# Altium PCB MOD-ADC-10.PCBDOC (part 1 of 4)
Units mm, origin at the board's own origin, x right, y up, seen from the top; angles counter-clockwise.
Board outline 80 x 100 mm, 4 copper layers (L1, P2, L3, L4), stack 1.512 mm thick; 199 components, 170 nets, 717 pads, 298 vias.
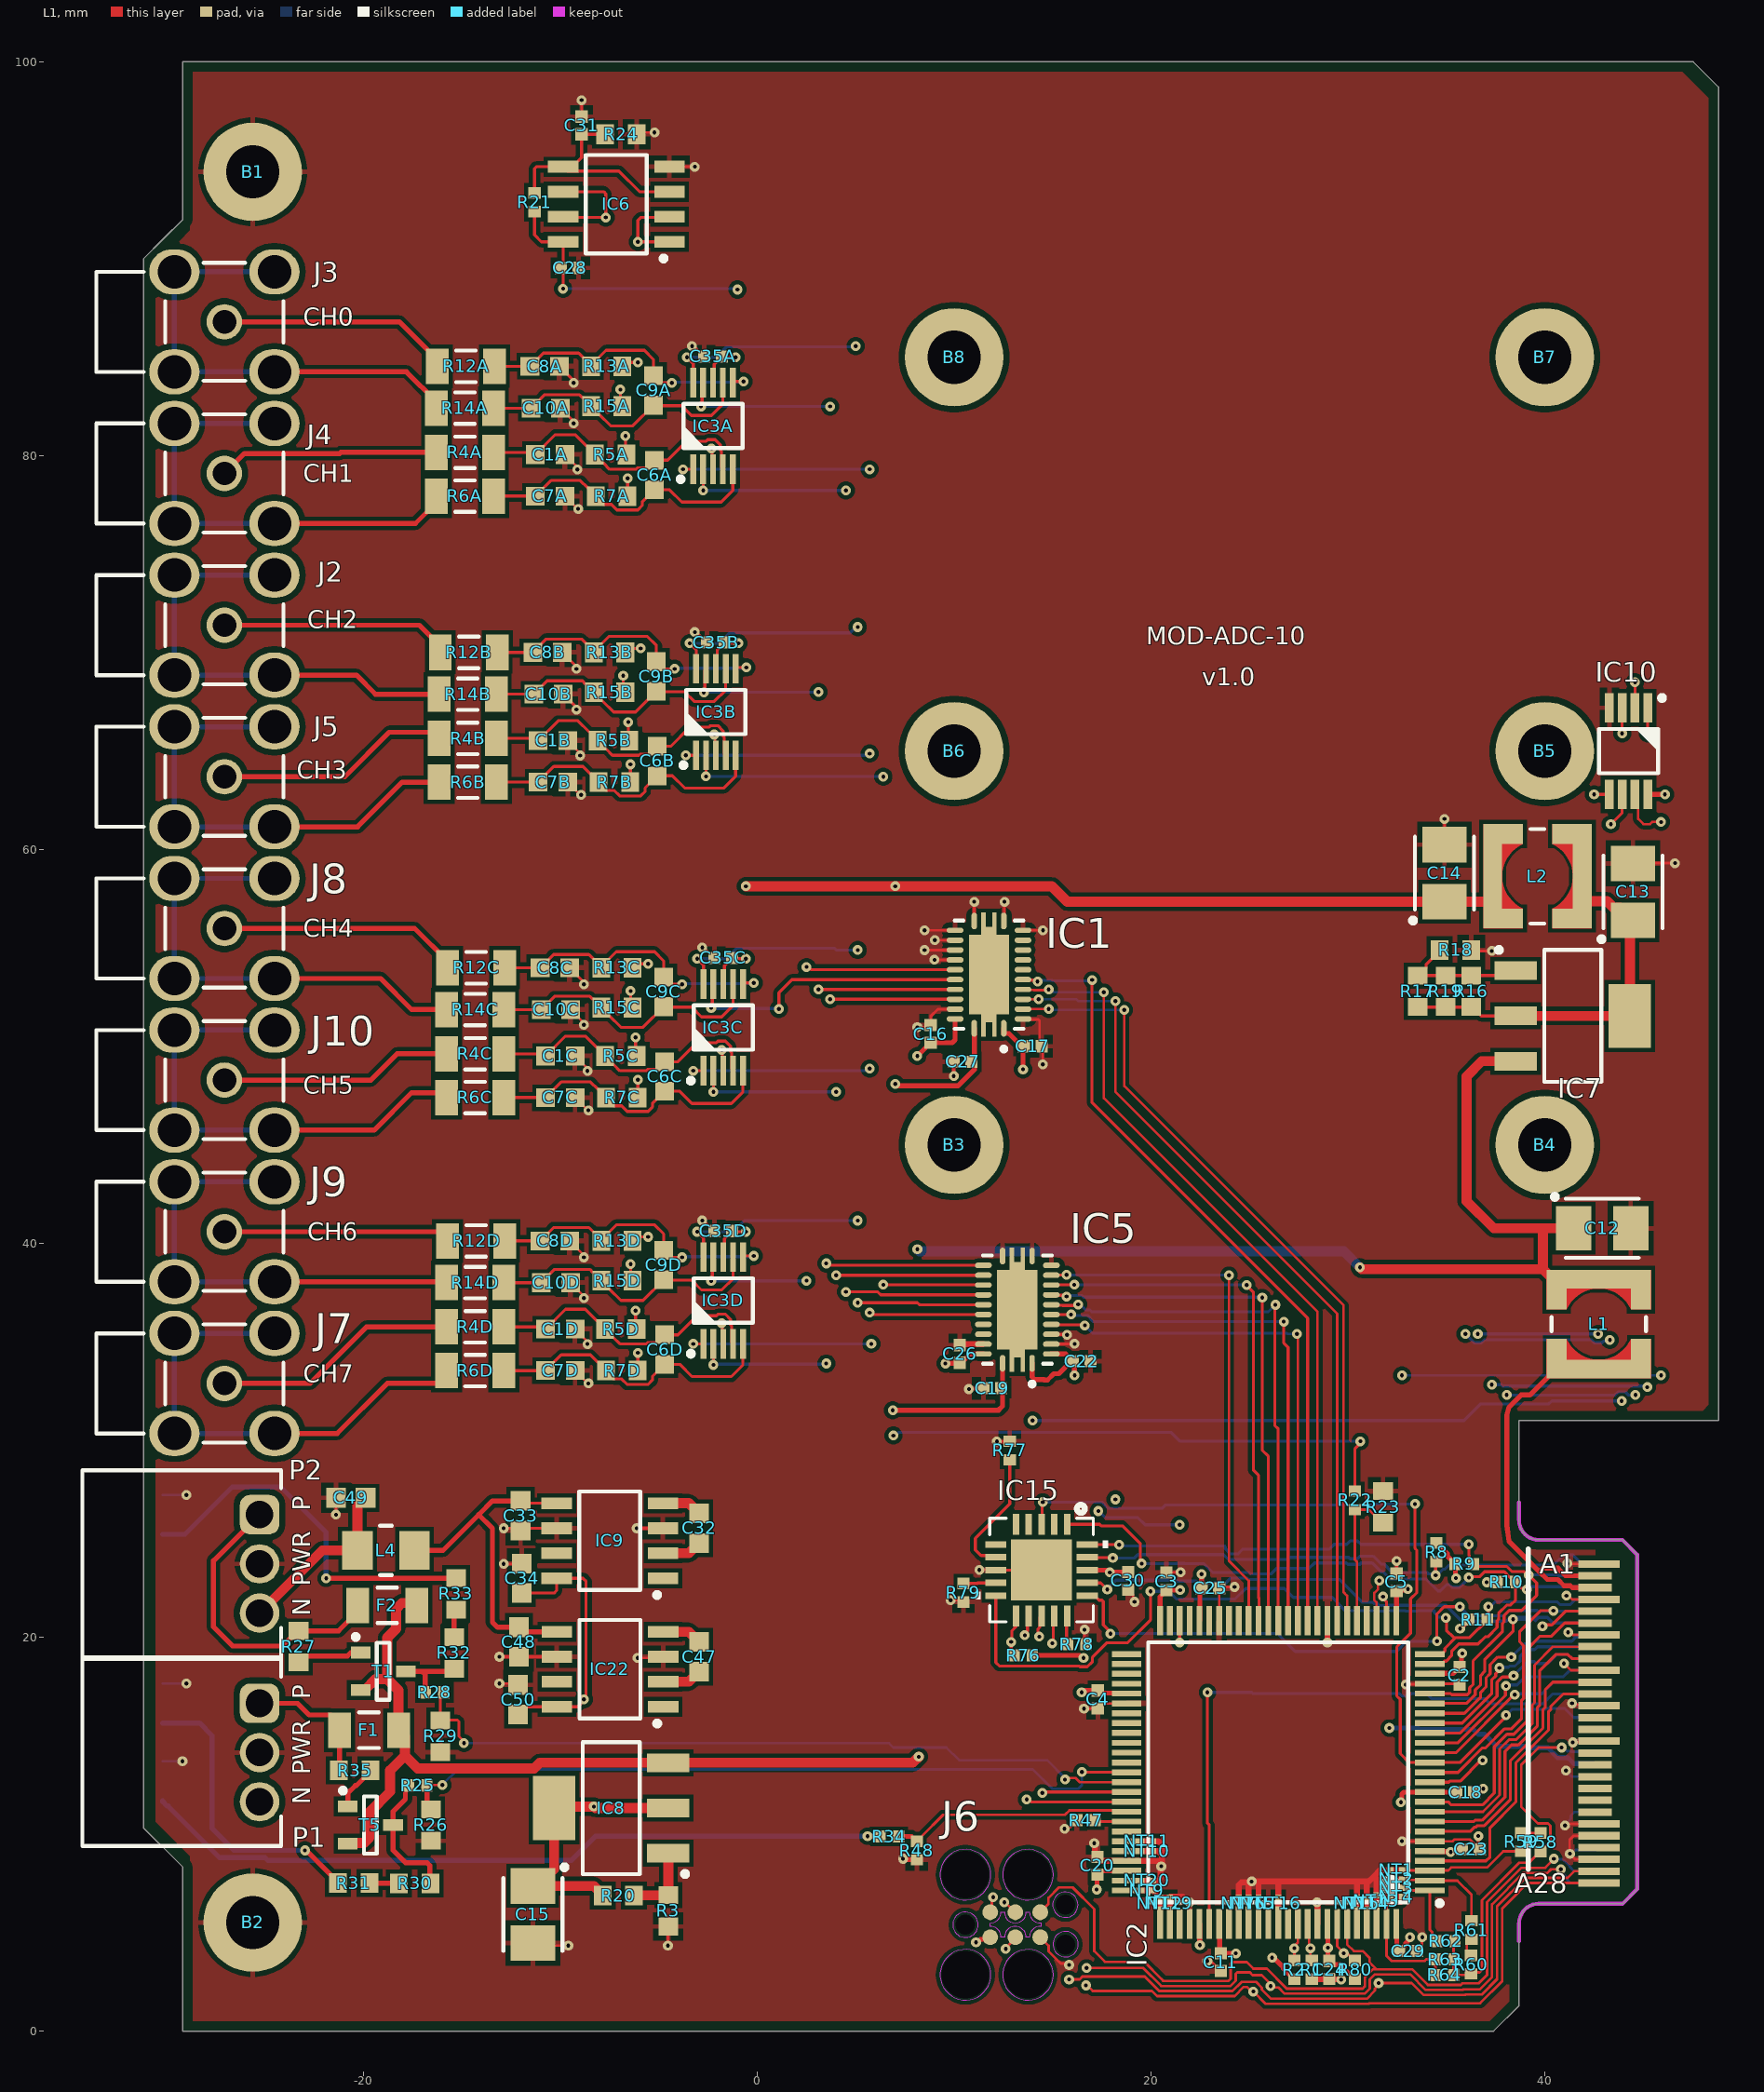
[diagram p0: L1 view]
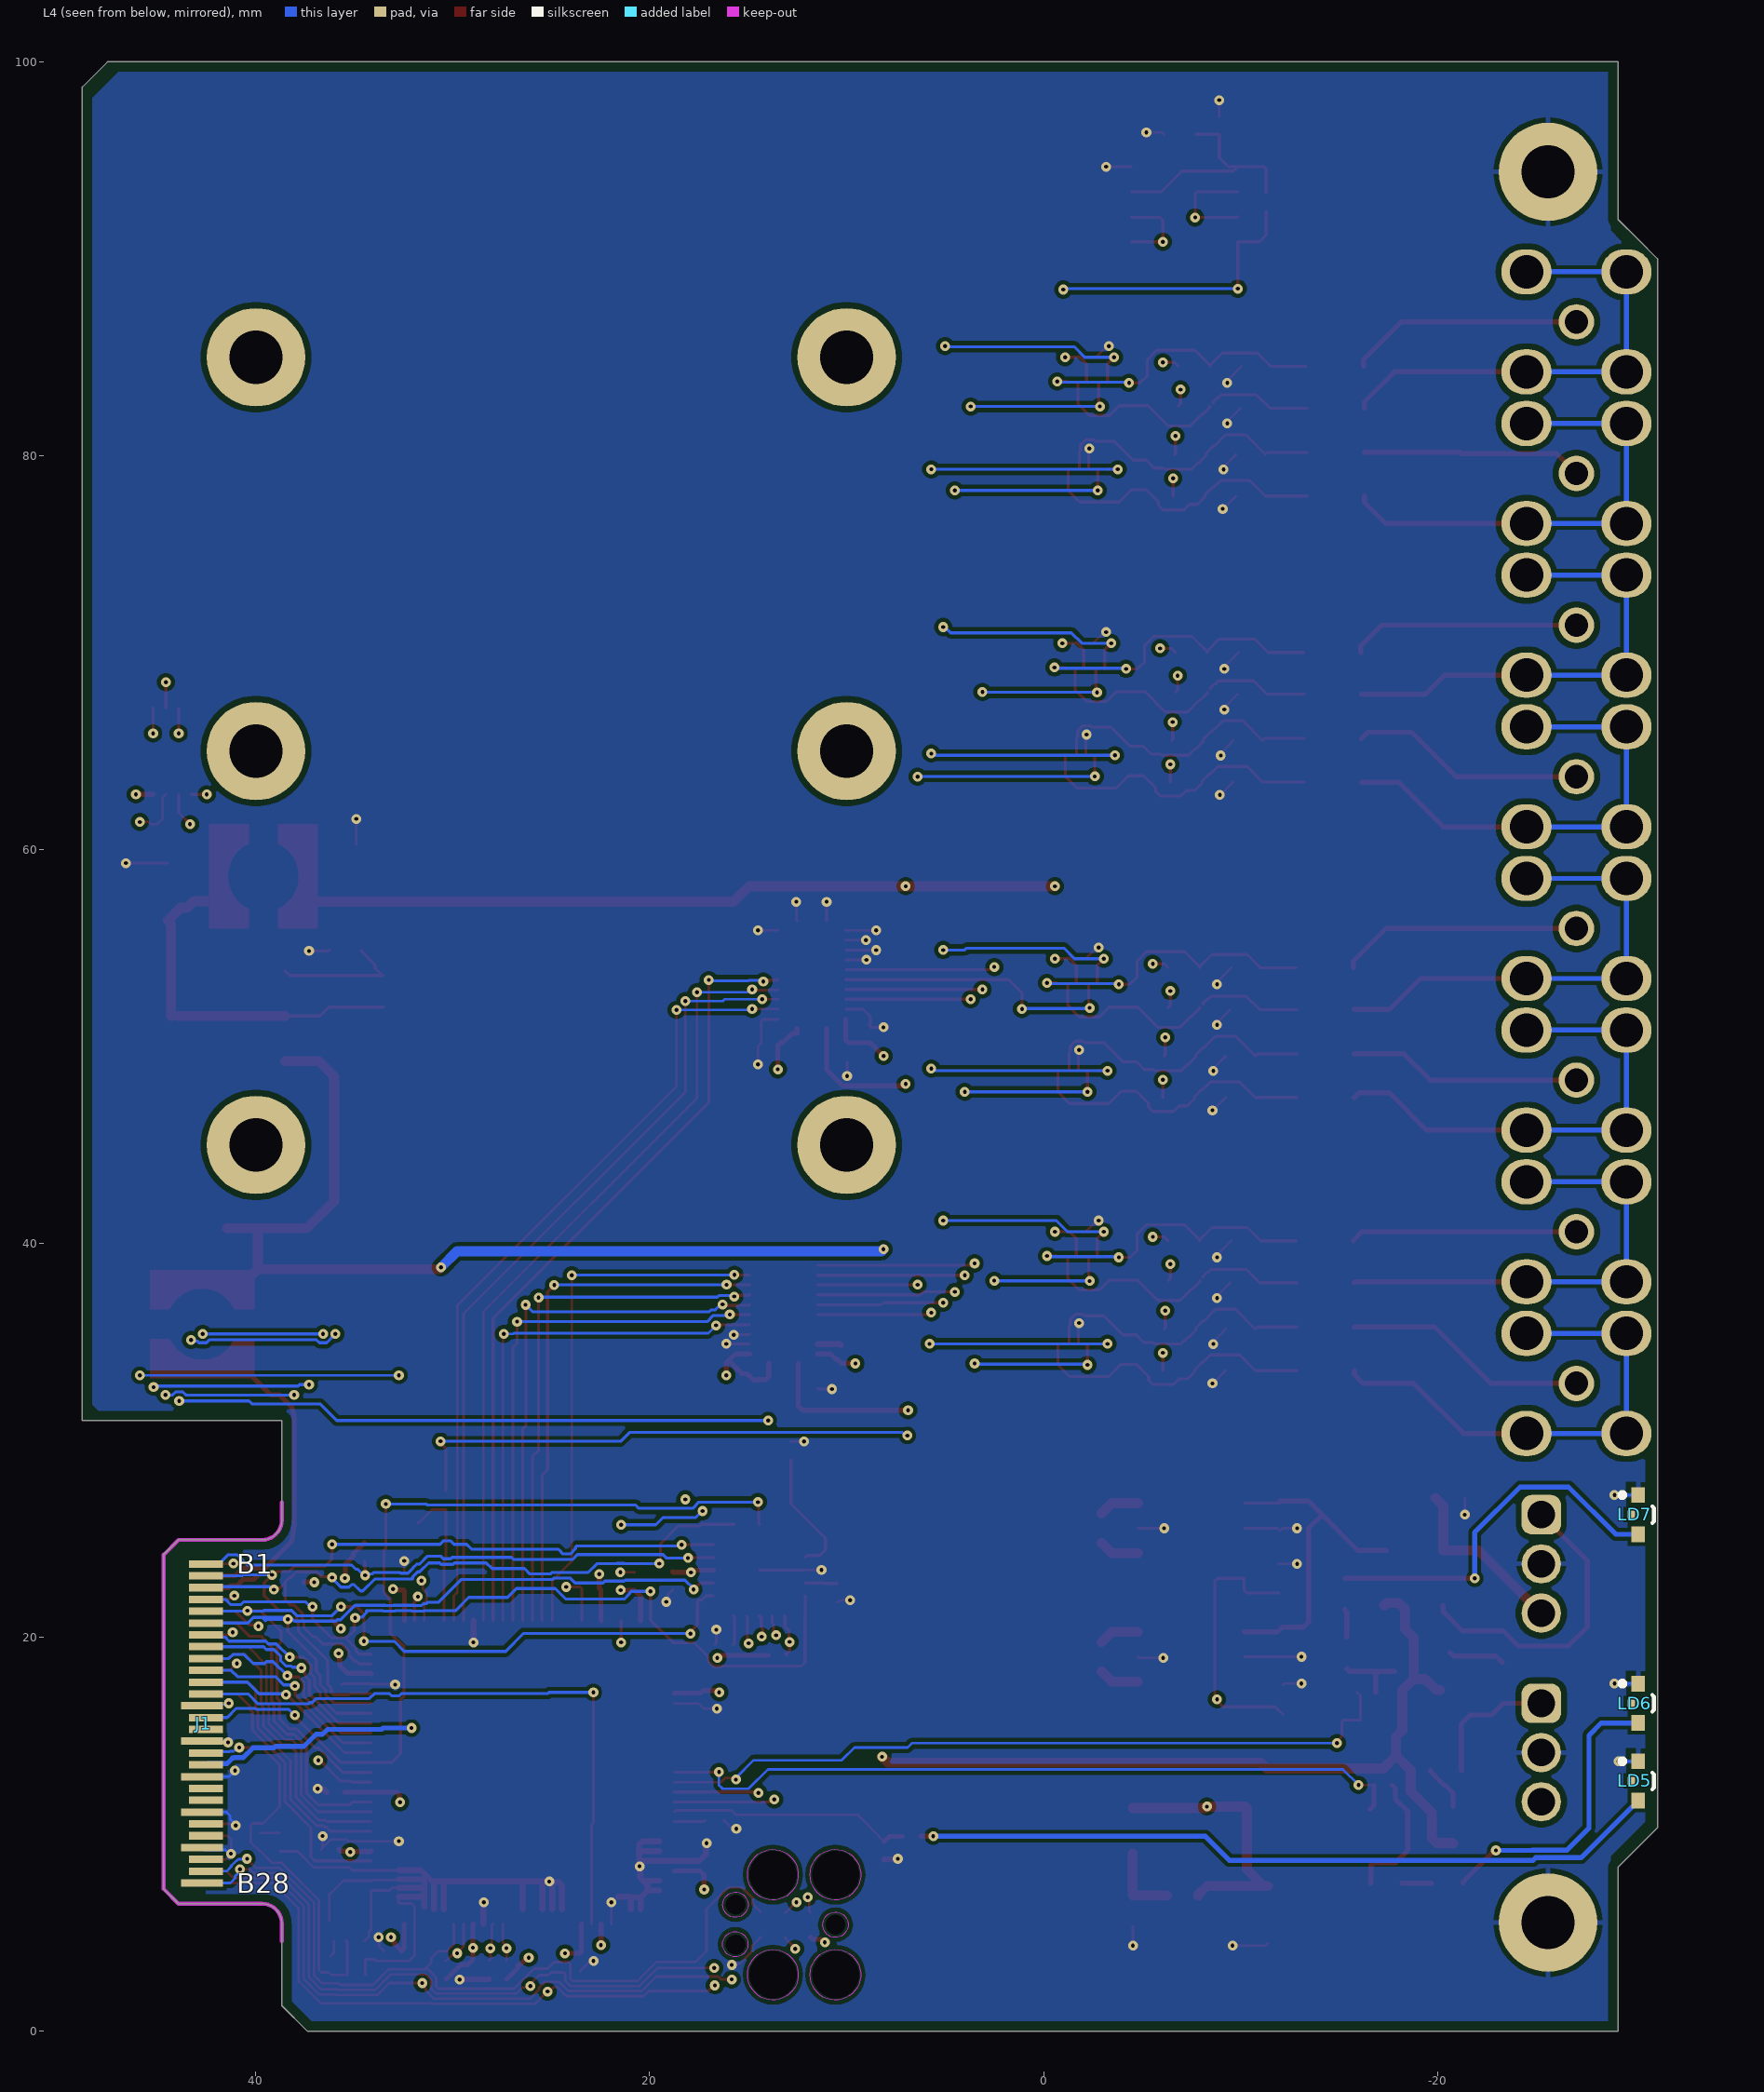
[diagram p1: L4 view, seen from below]
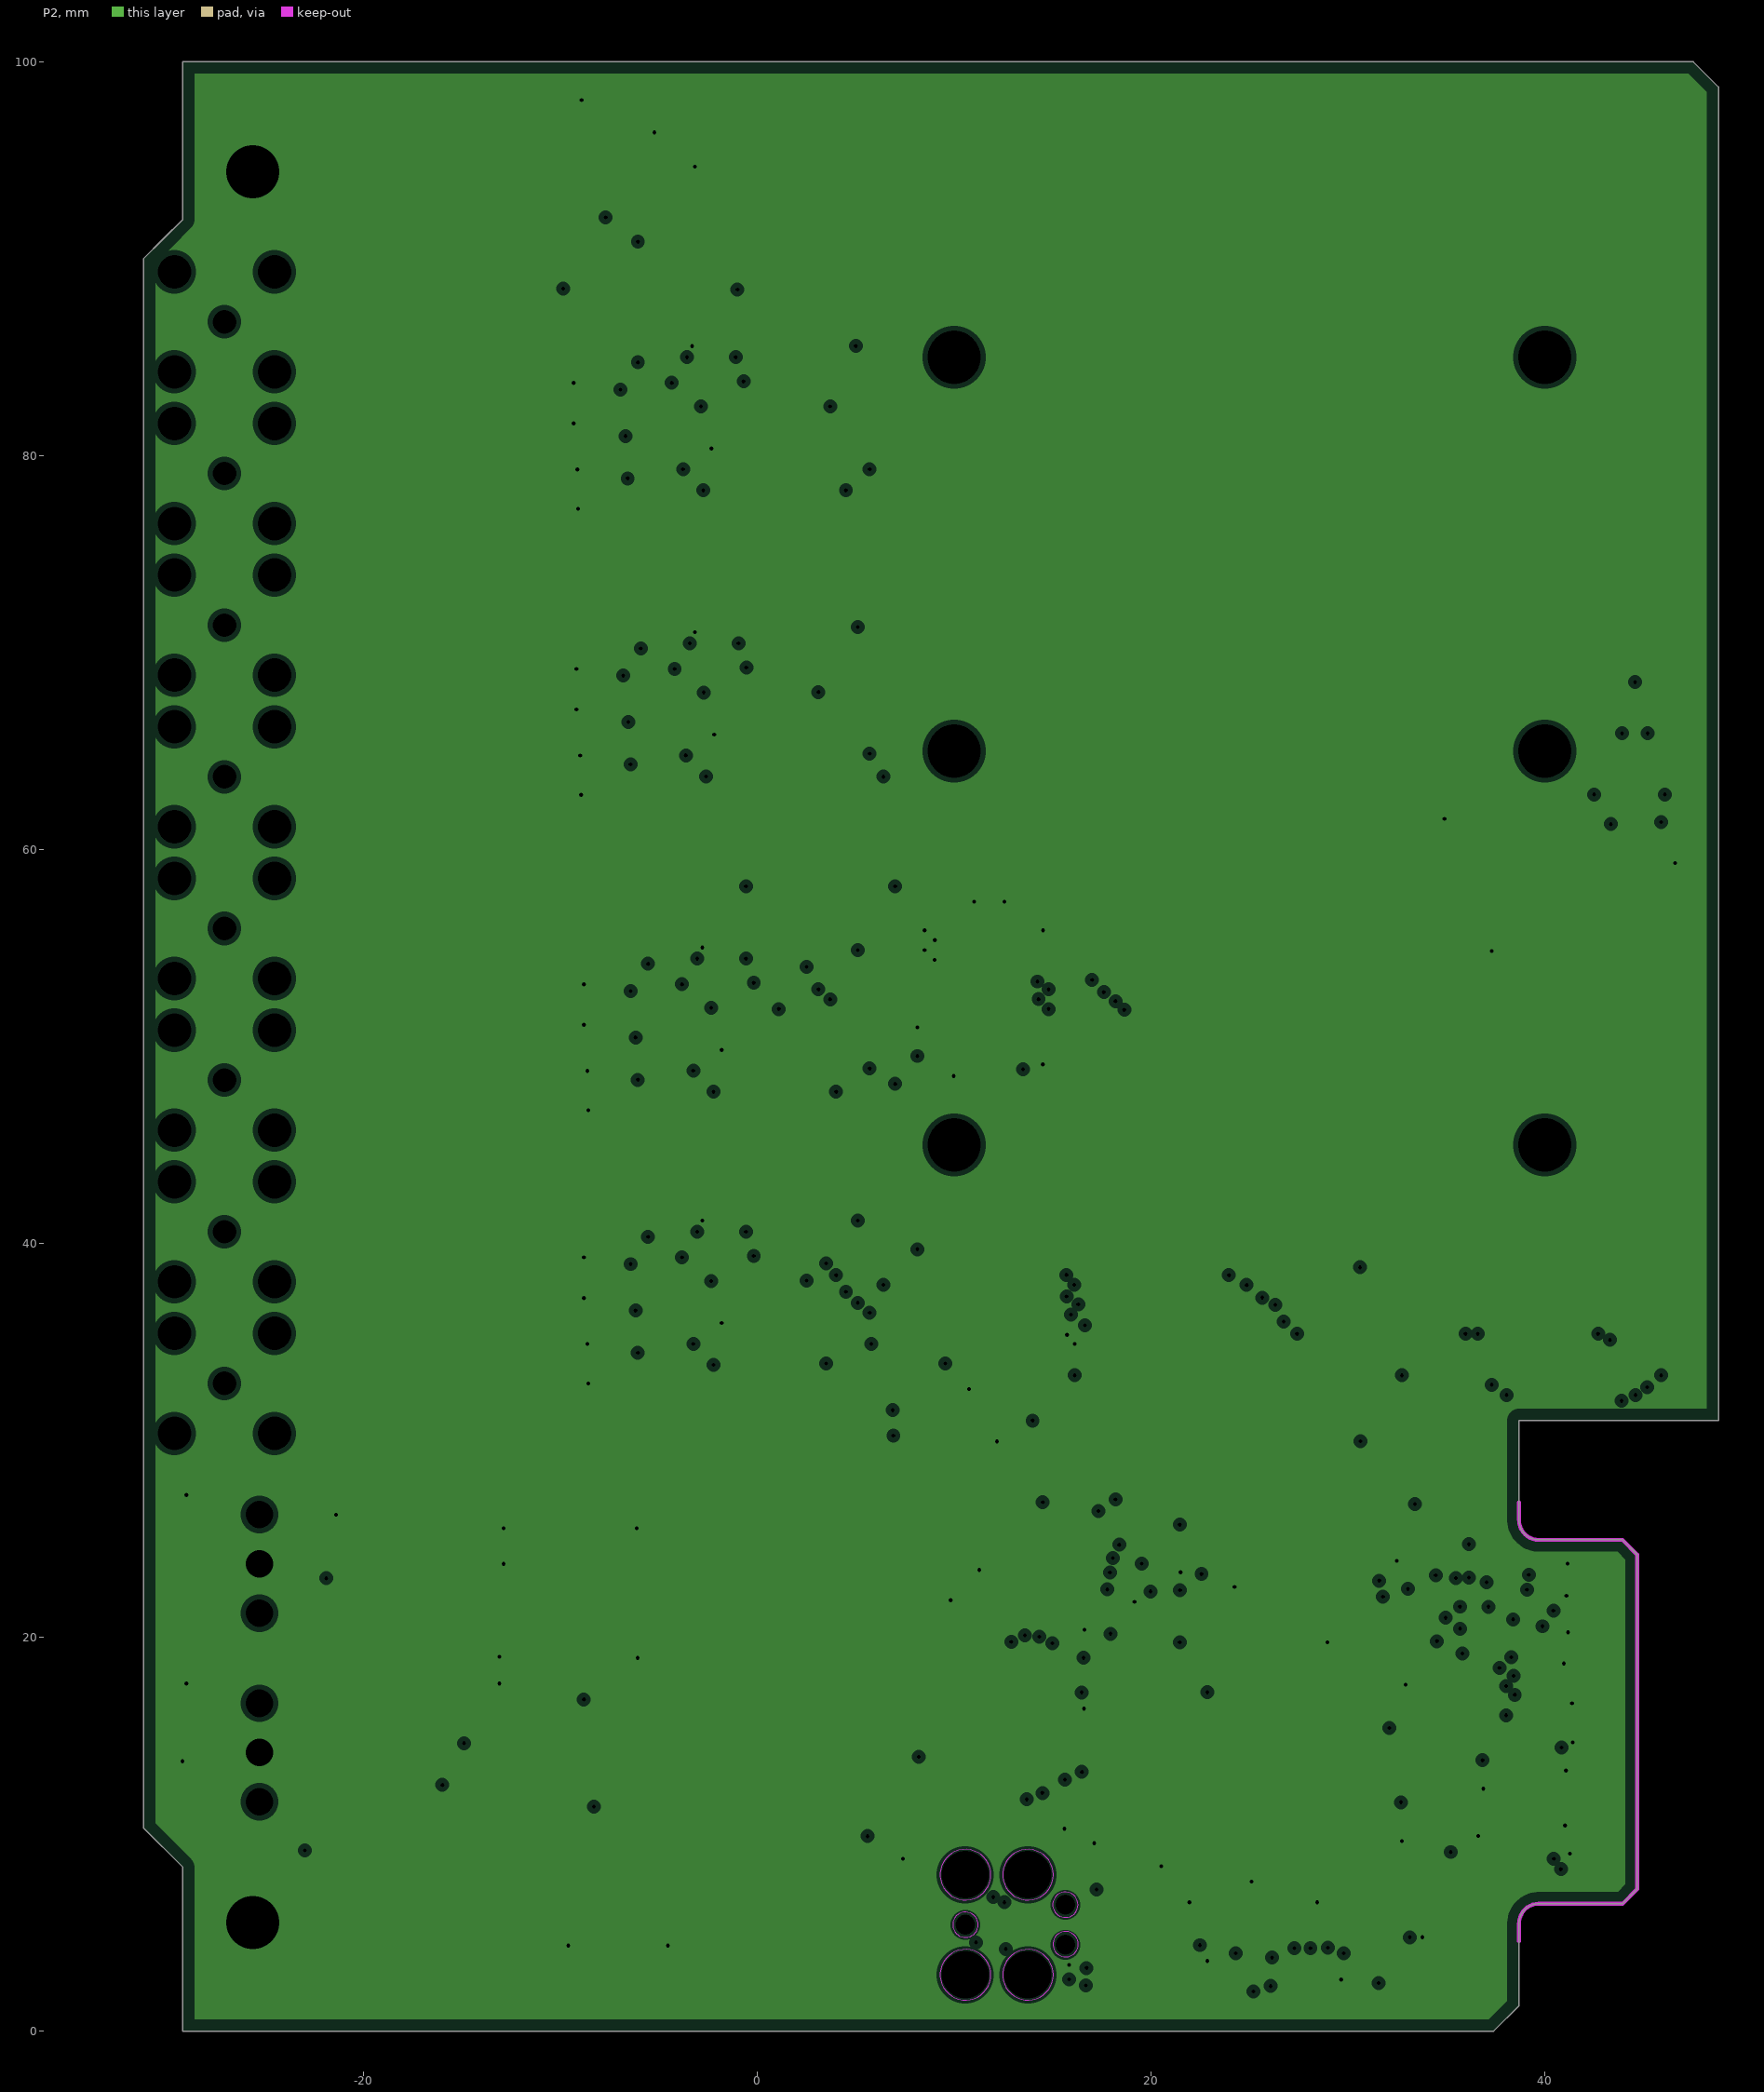
[diagram p2: P2, clearances drawn from the general rule]
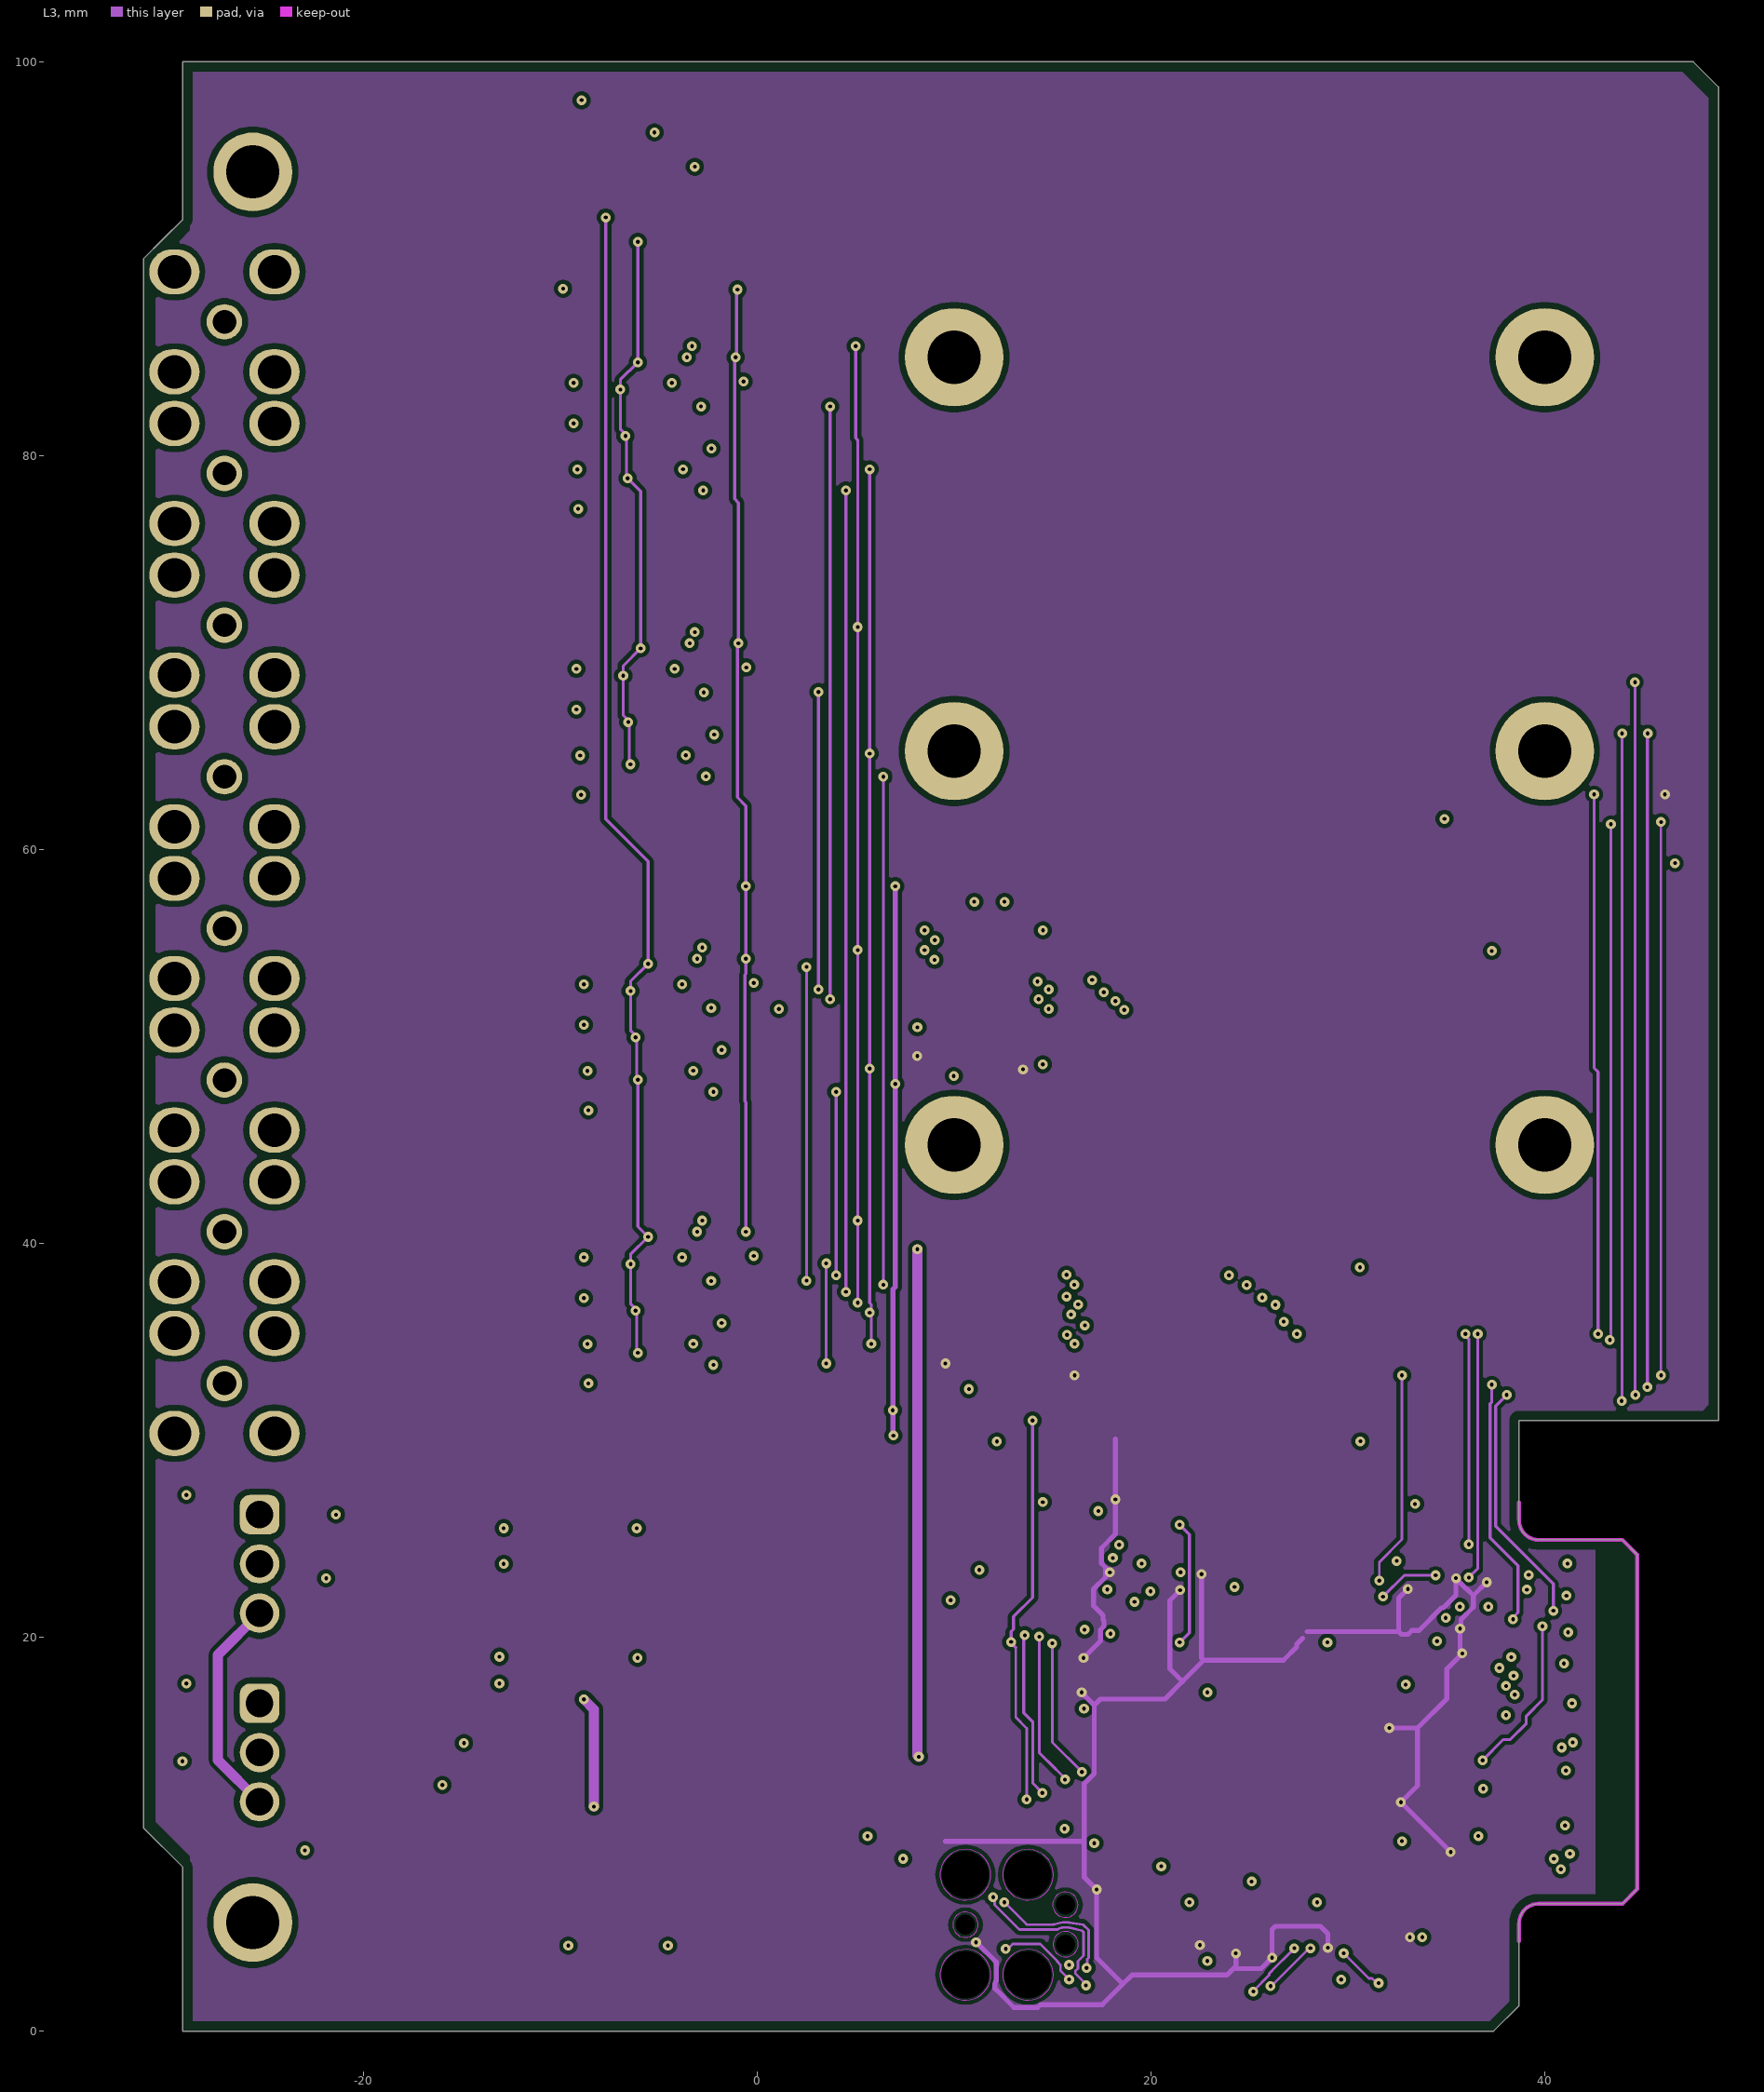
[diagram p3: L3]
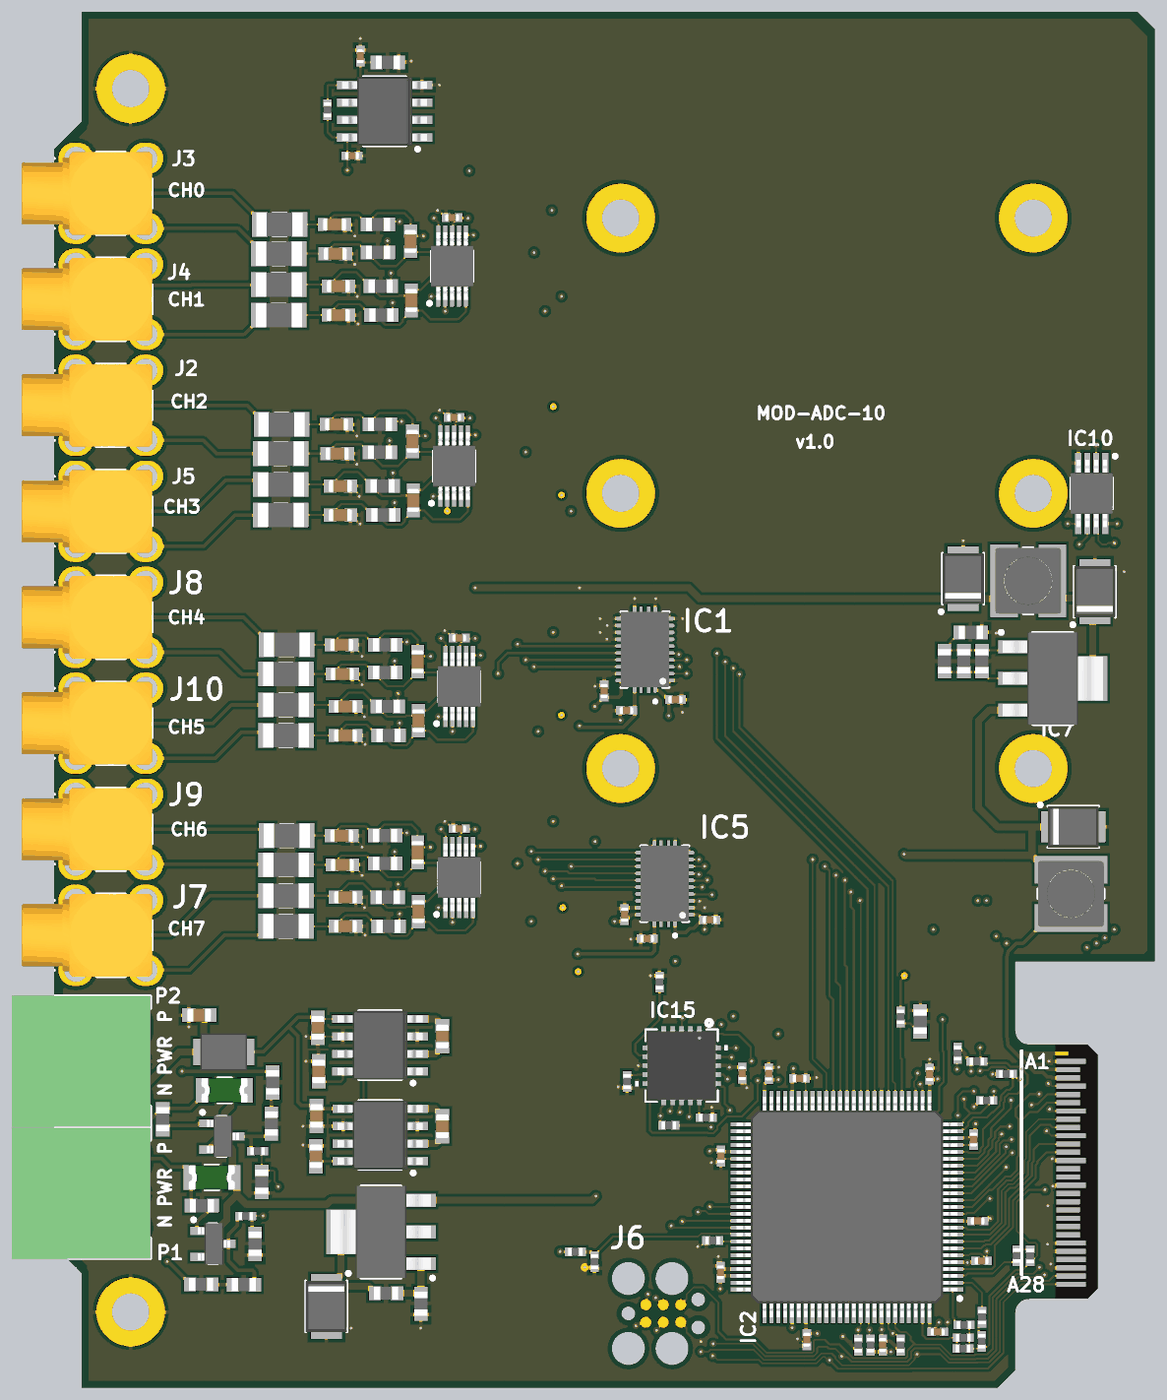
[diagram p6: 3D render of the assembled board from above, using the file's embedded part models]
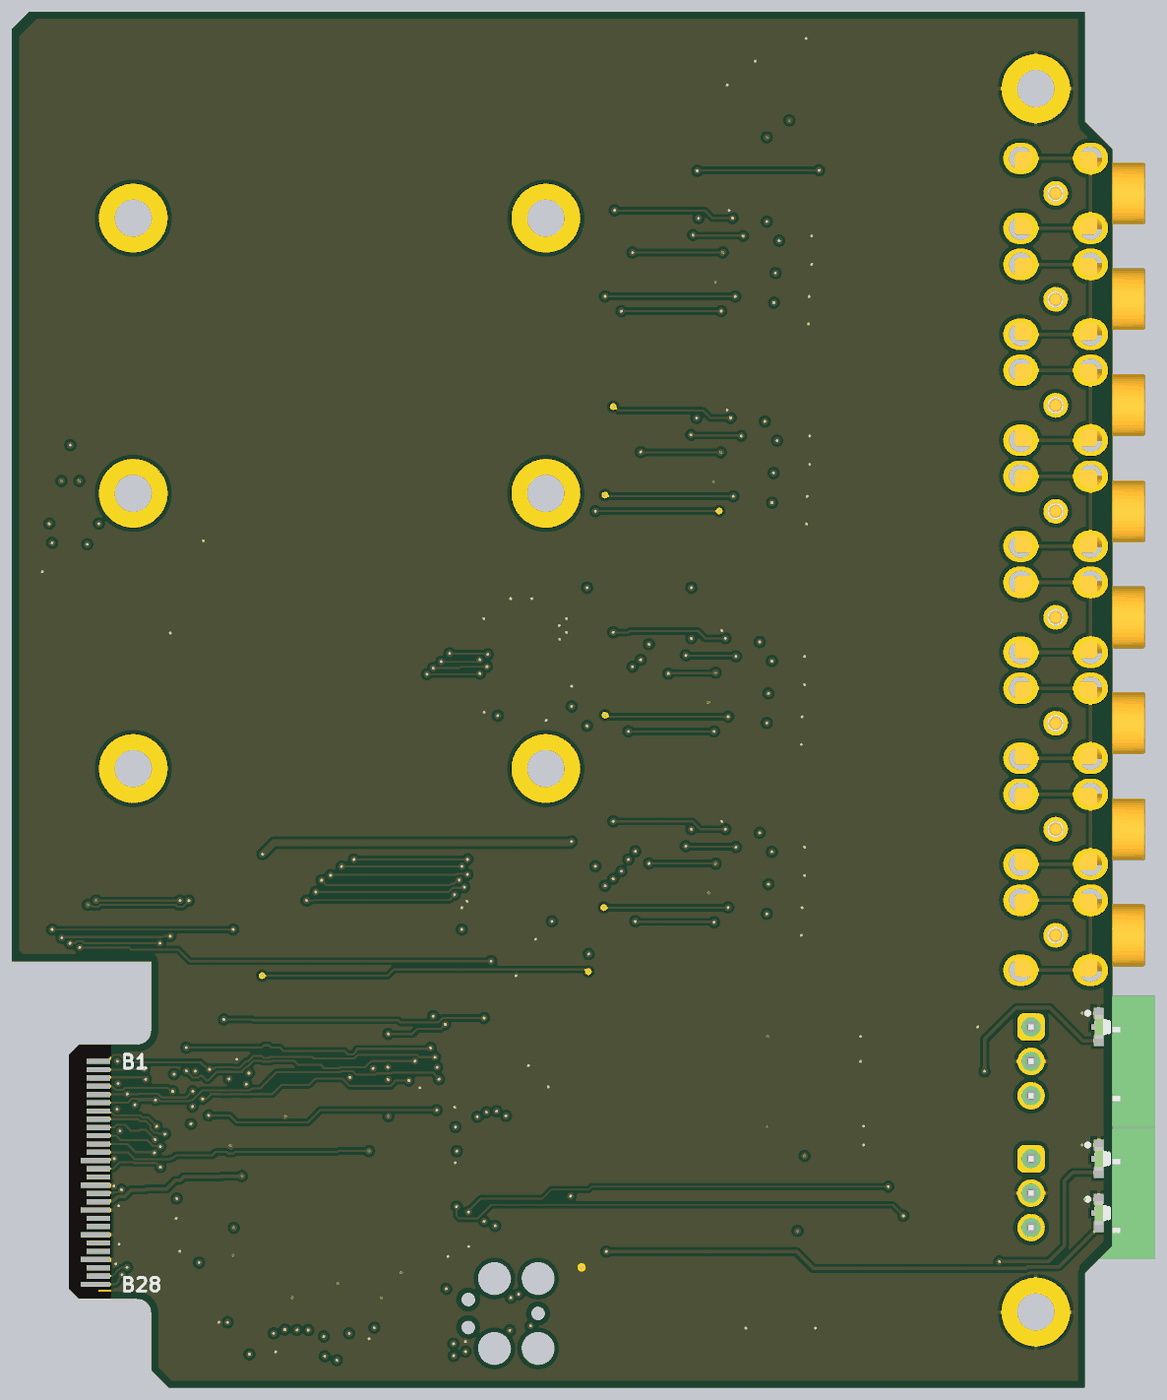
[diagram p7: 3D render of the assembled board from below, using the file's embedded part models]

## Layer stack, top to bottom
TopSolder: solder mask 0.025, Solder Resist, Dk 3.7
L1: signal copper 0.035
Dielectric1: core 0.138, FR-4, Dk 4.3
P2: plane copper 0.018, net GND
Dielectric3: core 1.13, FR-4, Dk 4.6
L3: signal copper 0.018
Dielectric5: core 0.138, FR-4, Dk 4.3
L4: signal copper 0.035
BottomSolder: solder mask 0.025, Solder Resist, Dk 3.7

## Board outline
-29.182,0 -29.182,8.32 -31.182,10.32 -31.182,90 -30.182,91 -29.182,92 -29.182,100 0,100 47.543,100 48.818,98.724 48.818,31 38.688,31 38.688,26.943 38.688,25.943 ccw(c39.688,25.943) 39.688,24.943 43.938,24.943 44.688,24.193 44.688,7.213 43.938,6.463 39.688,6.463 ccw(c39.688,5.463) 38.688,5.463 38.688,1.293 37.395,0 0,0

## Design rules (kind name [scope] priority, off if disabled: settings)
BoardOutlineClearance BoardOutlineClearance_SilkScreen [OnTopSilkscreen or OnBottomSilkscreen] p1: gap=0.3 ignorepadtopadclearanceinfootprint=FALSE
BoardOutlineClearance BoardOutlineClearance_Ext [(OnTopLayer or OnBottomLayer) and not (HasFootprint('EDGE10T1B6_P200W1000L0F100X400')  or HasFootprint('EDGE12T1B6_P200W1000L0F100X400') or HasFootprint('EDGE12T5B10_P200W1000L0F100X400') or HasFootprint('EDGE10T5B10_P200W1000L0F100X400'))] p2: gap=0.5 ignorepadtopadclearanceinfootprint=FALSE
BoardOutlineClearance BoardOutlineClearance_Int [not (OnTopLayer or OnBottomLayer)] p3: gap=0.5 ignorepadtopadclearanceinfootprint=FALSE
Clearance Clearance_DIFF [(InDifferentialPairClass('All Differential Pairs'))] p1: gap=0.127 ignorepadtopadclearanceinfootprint=FALSE except(0: Arc-Hole Track-Hole SMDPad-Hole THPad-Hole Via-Hole Fill-Hole Poly-Hole Region-Hole Text-Hole; 0.254: Arc-Poly Track-Poly SMDPad-Poly THPad-Poly Via-Poly Fill-Poly Poly-Poly Poly-Region Poly-Text)
Clearance [All] p2: gap=0.127 ignorepadtopadclearanceinfootprint=FALSE except(0: Arc-Hole Track-Hole SMDPad-Hole THPad-Hole Via-Hole Fill-Hole Poly-Hole Region-Hole Text-Hole; 0.2: Arc-Poly Track-Poly SMDPad-Poly Via-Poly Fill-Poly Poly-Poly; 0.3: THPad-Poly)
ComponentClearance [All] p1 off: gap=0.254 collisioncheckmode=3 verticalgap=0.254 showdistances=FALSE
DiffPairsRouting [All] p1: maxlimit=0.2 minlimit=0.2 mostfreqgap=0.2 toplayer_minwidth=0.18 toplayer_maxwidth=0.18 toplayer_prefwidth=0.18 midlayer1_minwidth=0.18 midlayer1_maxwidth=0.18 midlayer1_prefwidth=0.18 bottomlayer_minwidth=0.18 bottomlayer_maxwidth=0.18 bottomlayer_prefwidth=0.18 maxuncoupledlength=12.7
FabricationTestPointUsage TestPointUsage [All] p1: valid=0 allowmultiple=FALSE
FabricationTestpoint Testpoint [All] p1: side=3 testpointundercomponent=TRUE minsize=1.016 maxsize=2.54 preferedsize=1.524 minholesize=0.508 maxholesize=1.016 preferedholesize=0.813 testpointgrid=0.025 allowsidetop=TRUE allowsidebottom=TRUE usegrid=TRUE gridtolerance=0
Height [All] p1 off: minheight=0 maxheight=25.4 prefheight=12.7
HoleSize [All] p1: absolutevalues=TRUE maxlimit=3.81 minlimit=0.025 maxpercent=80.000 minpercent=20.000
HoleToHoleClearance [All] p1: gap=0.025 allowstackedmicrovias=TRUE
MinimumSolderMaskSliver [All] p1: minsoldermaskwidth=0
PlaneClearance [All] p1: clearance=0.254
PlaneConnect [All] p1: planeconnectstyle=Direct reliefexpansion=0.508 reliefentries=4 reliefconductorwidth=0.254 reliefairgap=0.254
PolygonConnect PolygonConnect_PWR [HasFootprint('MPS_MPM54304GMN') or HasFootprint('QFN65P500X500X100-21N-S325')] p1: connectstyle=Direct reliefconductorwidth=0.254 reliefentries=4 polygonreliefangle="90 Angle" airgapwidth=0.254
PolygonConnect PolygonConnect_EdgeCon [HasFootprint('EDGE10T1B6_P200W1000L0F100X400')  or HasFootprint('EDGE12T1B6_P200W1000L0F100X400') or HasFootprint('EDGE12T5B10_P200W1000L0F100X400') or HasFootprint('EDGE10T5B10_P200W1000L0F100X400')] p2: connectstyle=Direct reliefconductorwidth=0.254 reliefentries=4 polygonreliefangle="90 Angle" airgapwidth=0.254
PolygonConnect PolygonConnect_pad [(InPadClass('All Pads'))] p3: connectstyle=Relief reliefconductorwidth=0.254 reliefentries=4 polygonreliefangle="90 Angle" airgapwidth=0.254
PolygonConnect [All] p4: connectstyle=Direct reliefconductorwidth=0.254 reliefentries=4 polygonreliefangle="45 Angle" airgapwidth=0.254
RoomDefinition Overlapping [InComponentClass('Overlapping')] p1 off: confinementstyle=ConfineIn formatcopy=TRUE lockcomponents=FALSE outline -210.859,-125.686 -160.059,-125.686 -160.059,-100.286 -210.859,-100.286
RoomDefinition U_ADC_CH3 [InComponentClass('U_ADC_CH3')] p2 off: confinementstyle=ConfineIn formatcopy=TRUE lockcomponents=FALSE outline -17.281,32.172 0.408,32.172 0.408,41.489 -17.281,41.489
RoomDefinition U_ADC_CH2 [InComponentClass('U_ADC_CH2')] p3 off: confinementstyle=ConfineIn formatcopy=TRUE lockcomponents=FALSE outline -17.281,46.039 0.408,46.039 0.408,55.357 -17.281,55.357
RoomDefinition U_ADC_CH1 [InComponentClass('U_ADC_CH1')] p4 off: confinementstyle=ConfineIn formatcopy=TRUE lockcomponents=FALSE outline -17.656,62.056 0.033,62.056 0.033,71.374 -17.656,71.374
RoomDefinition U_ADC_CH0 [InComponentClass('U_ADC_CH0')] p5 off: confinementstyle=ConfineIn formatcopy=TRUE lockcomponents=FALSE outline -17.8,76.582 -0.111,76.582 -0.111,85.9 -17.8,85.9
RoutingLayers RoutingLayers_Diff [IsDifferentialPair] p1: top layer_v5=TRUE mid layer 1_v5=FALSE bottom layer_v5=TRUE
RoutingLayers [Not IsDifferentialPair] p2: top layer_v5=TRUE mid layer 1_v5=TRUE bottom layer_v5=TRUE
RoutingVias [All] p1: holewidth=0.2 width=0.5 viastyle="Through Hole" minholewidth=0.2 minwidth=0.5 maxholewidth=1 maxwidth=2
SilkToSilkClearance [All] p1: silktosilkclearance=0
SilkToSolderMaskClearance SilkscreenOverComponentPads [IsPad] p1: minsilkscreentomaskgap=0 clearancetoexposedcopper=TRUE
SolderMaskExpansion [All] p1: expansion=0.051 istentingtop=FALSE
SupplyNets "Schematic Supply Nets_1" [InNet('P3V3MP')] p1: voltage=0.000
SupplyNets "Schematic Supply Nets_11" [InNet('P10V0')] p2: voltage=0.000
SupplyNets "Schematic Supply Nets_10" [InNet('N10V0')] p3: voltage=0.000
SupplyNets "Schematic Supply Nets_9" [InNet('P5V0A')] p4: voltage=0.000
SupplyNets "Schematic Supply Nets_5" [InNet('P12V0A')] p5: voltage=0.000
SupplyNets "Schematic Supply Nets" [InNet('P5V0')] p6: voltage=0.000
SupplyNets "Schematic Supply Nets_7" [InNet('P12V0')] p7: voltage=0.000
SupplyNets "Schematic Supply Nets_6" [InNet('GND')] p8: voltage=0.000
Width Width_50R [InNetClass('50_Ohms')   or InNetClass('Z50R')] p1: maxlimit=0.25 minlimit=0.25 preferedwidth=0.25
Width [All] p2: maxlimit=1.27 minlimit=0.127 preferedwidth=0.127
17 further rules are at their usual default settings.

## Classes and differential pairs
component class Overlapping: SCREW1 SCREW2 SCREW3 SCREW4 SCREW5 SCREW6
channel class ADC_CH: U_ADC_CH0 U_ADC_CH1 U_ADC_CH2 U_ADC_CH3
component class U_ADC_CH3: C1D C6D C7D C8D C9D C10D C35D IC3D R4D R5D R6D R7D R12D R13D R14D R15D
component class U_ADC_CH2: C1C C6C C7C C8C C9C C10C C35C IC3C R4C R5C R6C R7C R12C R13C R14C R15C
component class U_ADC_CH1: C1B C6B C7B C8B C9B C10B C35B IC3B R4B R5B R6B R7B R12B R13B R14B R15B
component class U_ADC_CH0: C1A C6A C7A C8A C9A C10A C35A IC3A R4A R5A R6A R7A R12A R13A R14A R15A
differential pair ETH_T1x: +ETH_T1x_P -ETH_T1x_N
differential pair ETH_R1x: +ETH_R1x_P -ETH_R1x_N
differential pair ETH_Tx: +ETH_Tx_P -ETH_Tx_N
differential pair ETH_Rx: +ETH_Rx_P -ETH_Rx_N
differential pair CLK10: +CLK10_P -CLK10_N

## Components (designator, comment, footprint, x,y, rotation, side; value= is the part's Value field where it differs from the comment)
B1 "Plated Hole" MTG270_500#1 -25.626,94.412 r90 top
B2 "Plated Hole" MTG270_500#1 -25.626,5.512 r90 top
B3 "Plated Hole" MTG270_500#2 10,45 r0 top
B4 "Plated Hole" MTG270_500#2 40,45 r0 top
B5 "Plated Hole" MTG270_500#2 40,65 r0 top
B6 "Plated Hole" MTG270_500#2 10,65 r0 top
B7 "Plated Hole" MTG270_500#2 40,85 r0 top
B8 "Plated Hole" MTG270_500#2 10,85 r0 top
C1A "1nF" CAPC1608X90N -10.525,80.057 r0 top (schematic designator C1)
C1B "1nF" CAPC1608X90N -10.381,65.531 r0 top (schematic designator C1)
C1C "1nF" CAPC1608X90N -10.006,49.514 r0 top (schematic designator C1)
C1D "1nF" CAPC1608X90N -10.006,35.647 r0 top (schematic designator C1)
C2 "1uF" CAPC1005X55N 35.666,18.042 r90 top
C3 "1uF" CAPC1005X55N 20.777,22.834 r270 top
C4 "1uF" CAPC1005X55N 17.289,16.842 r90 top
C5 "1uF" CAPC1005X55N 32.466,22.795 r270 top
C6A "1nF" CAPC1608X90N -5.225,79.019 r90 top (schematic designator C6)
C6B "1nF" CAPC1608X90N -5.081,64.493 r90 top (schematic designator C6)
C6C "1nF" CAPC1608X90N -4.706,48.476 r90 top (schematic designator C6)
C6D "1nF" CAPC1608X90N -4.706,34.608 r90 top (schematic designator C6)
C7A "1nF" CAPC1608X90N -10.525,77.95 r180 top (schematic designator C7)
C7B "1nF" CAPC1608X90N -10.381,63.424 r180 top (schematic designator C7)
C7C "1nF" CAPC1608X90N -10.006,47.407 r180 top (schematic designator C7)
C7D "1nF" CAPC1608X90N -10.006,33.539 r180 top (schematic designator C7)
C8A "1nF" CAPC1608X90N -10.8,84.536 r0 top (schematic designator C8)
C8B "1nF" CAPC1608X90N -10.656,70.01 r0 top (schematic designator C8)
C8C "1nF" CAPC1608X90N -10.281,53.993 r0 top (schematic designator C8)
C8D "1nF" CAPC1608X90N -10.281,40.126 r0 top (schematic designator C8)
C9A "1nF" CAPC1608X90N -5.275,83.315 r90 top (schematic designator C9)
C9B "1nF" CAPC1608X90N -5.131,68.789 r90 top (schematic designator C9)
C9C "1nF" CAPC1608X90N -4.756,52.772 r90 top (schematic designator C9)
C9D "1nF" CAPC1608X90N -4.756,38.904 r90 top (schematic designator C9)
C10A "1nF" CAPC1608X90N -10.75,82.415 r180 top (schematic designator C10)
C10B "1nF" CAPC1608X90N -10.606,67.889 r180 top (schematic designator C10)
C10C "1nF" CAPC1608X90N -10.231,51.872 r180 top (schematic designator C10)
C10D "1nF" CAPC1608X90N -10.231,38.004 r180 top (schematic designator C10)
C11 "1uF" CAPC1005X55N 23.533,3.497 r90 top
C12 "22uF" CAPMP3528X210N 42.909,40.765 r0 top
C13 "22uF" CAPMP3528X210N 44.475,57.848 r90 top
C14 "22uF" CAPMP3528X210N 34.9,58.798 r90 top
C15 "22uF" CAPMP3528X210N -11.4,5.916 r270 top
C16 "100nF" CAPC1005X55N 8.8,50.637 r270 top
C17 "100nF" CAPC1005X55N 13.982,50.014 r180 top
C18 "1uF" CAPC1005X55N 35.961,12.128 r180 top
C19 "100nF" CAPC1005X55N 11.931,32.639 r0 top
C20 "1uF" CAPC1005X55N 17.272,8.4 r270 top
C22 "100nF" CAPC1005X55N 16.472,34.014 r180 top
C23 "1uF" CAPC1005X55N 36.246,9.229 r180 top
C24 "1uF" CAPC1005X55N 29.054,3.108 r90 top
C25 "1uF" CAPC1005X55N 23.011,22.483 r180 top
C26 "100nF" CAPC1005X55N 10.287,34.385 r270 top
C27 "100nF" CAPC1005X55N 10.427,49.226 r0 top
C28 "100nF" CAPC1005X55N -9.525,89.538 r180 top
C29 "1uF" CAPC1005X55N 33.054,4.06 r180 top
C30 "1uF" CAPC1005X55N 18.832,22.867 r90 top
C31 "100nF" CAPC1005X55N -8.926,96.77 r270 top
C32 "10uF" CAPC1608X80N -2.954,25.534 r90 top
C33 "10uF" CAPC1608X80N -12.025,26.169 r90 top
C34 "10uF" CAPC1608X80N -11.961,22.994 r270 top
C35A "100nF" CAPC1005X55N -2.25,85.038 r0 top (schematic designator C35)
C35B "100nF" CAPC1005X55N -2.106,70.512 r0 top (schematic designator C35)
C35C "100nF" CAPC1005X55N -1.731,54.495 r0 top (schematic designator C35)
C35D "100nF" CAPC1005X55N -1.731,40.628 r0 top (schematic designator C35)
C47 "10uF" CAPC1608X80N -2.955,19.007 r90 top
C48 "10uF" CAPC1608X80N -12.115,19.757 r90 top
C49 "10uF" CAPC1608X80N -20.65,27.078 r0 top
C50 "10uF" CAPC1608X80N -12.155,16.827 r270 top
F1 "160mA-48V" FUSRC3216X100N -19.725,15.278 r0 top
F2 "160mA-48V" FUSRC3216X100N -18.8,21.618 r0 top
IC1 "SN74LXC8T245RHL" "TEXAS_RHL (S-PVQFN-N24)" 11.768,53.647 r180 top
IC2 "LCMXO3LF-1300C-5TG100C" QFP50P1600X1600X160-100N 26.454,13.138 r180 top locked
IC3A "ADS1118IDGST" SOP50P490X110-10N -2.25,81.509 r90 top (schematic designator IC3)
IC3B "ADS1118IDGST" SOP50P490X110-10N -2.106,66.983 r90 top (schematic designator IC3)
IC3C "ADS1118IDGST" SOP50P490X110-10N -1.731,50.966 r90 top (schematic designator IC3)
IC3D "ADS1118IDGST" SOP50P490X110-10N -1.731,37.098 r90 top (schematic designator IC3)
IC5 "SN74LXC8T245RHL" "TEXAS_RHL (S-PVQFN-N24)" 13.206,36.635 r180 top
IC6 "LMV358IDT" SOIC127P600X175-8N -7.165,92.77 r180 top
IC7 "LM1117IMPX-ADJ/NOPB" SOT230P700X180-4N 41.417,51.551 r0 top
IC8 "LM1117IMPX-ADJ/NOPB" SOT230P700X180-4N -7.425,11.324 r180 top
IC9 "TC7660SEOA" SOIC127P600X175-8N -7.494,24.899 r180 top
IC10 "TMP1075DGK" SOP65P490X110-8N 44.25,65 r270 top
IC15 "PCA9501BS" HVQFN20_SOT662-1_5X5_NXP 14.432,23.408 r270 top
IC22 "TC7660SEOA" SOIC127P600X175-8N -7.486,18.372 r180 top
J1 "" AMPHENOL_MINI-COOL-56P 43.188,15.703 r270 bottom
J2 "60611002111502" 60611002111502 -27.068,71.396 r270 top
J3 "60611002111502" 60611002111502 -27.068,86.8 r270 top
J4 "60611002111502" 60611002111502 -27.068,79.098 r270 top
J5 "60611002111502" 60611002111502 -27.068,63.695 r270 top
J6 "TC2030-MCP" TC2030-MCP 13.1,5.4 r0 top
J7 "60611002111502" 60611002111502 -27.068,32.888 r270 top
J8 "60611002111502" 60611002111502 -27.068,55.993 r270 top
J9 "60611002111502" 60611002111502 -27.068,40.589 r270 top
J10 "60611002111502" 60611002111502 -27.068,48.291 r270 top
L1 "33uH" IND_WURTH_WE-TPC_4828 42.738,35.899 r90 top
L2 "33uH" IND_WURTH_WE-TPC_4828 39.625,58.643 r180 top
L4 "100uH" INDM3225X240N -18.86,24.411 r180 top
LD5 "Green" LED_AVAGO_HSME-C120 -30.2,12.7 r270 bottom
LD6 "Red" LED_AVAGO_HSMC-C120 -30.2,16.644 r270 bottom (schematic designator LD1)
LD7 "Red" LED_AVAGO_HSMC-C120 -30.2,26.223 r270 bottom (schematic designator LD2)
NT1 "Net Tie" "Net Tie 3" 32.754,8.167 r180 top net-tie
NT2 "Net Tie" "Net Tie 3" 32.754,7.71 r180 top net-tie
NT3 "Net Tie" "Net Tie 3" 32.754,7.266 r180 top net-tie
NT4 "Net Tie" "Net Tie 3" 32.754,6.816 r180 top net-tie
NT5 "Net Tie" "Net Tie 3" 25.454,6.188 r90 top net-tie
NT6 "Net Tie" "Net Tie 3" 24.954,6.188 r90 top net-tie
NT7 "Net Tie" "Net Tie 3" 24.454,6.188 r90 top net-tie
NT9 "Net Tie" "Net Tie 3" 19.504,7.138 r0 top net-tie
NT10 "Net Tie" "Net Tie 3" 19.504,9.138 r0 top net-tie
NT11 "Net Tie" "Net Tie 3" 19.504,9.638 r0 top net-tie
NT12 "Net Tie" "Net Tie 3" 20.454,6.188 r90 top net-tie
NT13 "Net Tie" "Net Tie 3" 31.449,6.299 r90 top net-tie
NT14 "Net Tie" "Net Tie 3" 30.954,6.188 r90 top net-tie
NT15 "Net Tie" "Net Tie 3" 30.454,6.188 r90 top net-tie
NT16 "Net Tie" "Net Tie 3" 26.454,6.188 r90 top net-tie
NT19 "Net Tie" "Net Tie 3" 20.954,6.188 r90 top net-tie
NT20 "Net Tie" "Net Tie 3" 19.504,7.638 r0 top net-tie
P1 "691382010003" 691382010003 -29.233,14.144 r270 top
P2 "691382010003" 691382010003 -29.233,23.723 r270 top
R1 "20k" RESC1005X40N 28.164,3.108 r270 top
R2 "20k" RESC1005X40N 27.275,3.108 r270 top
R3 "4k7" RESC1608X55N -4.525,6.108 r90 top
R4A "120k" RESC3216X65N -14.85,80.169 r0 top (schematic designator R4)
R4B "120k" RESC3216X65N -14.706,65.643 r0 top (schematic designator R4)
R4C "120k" RESC3216X65N -14.331,49.626 r0 top (schematic designator R4)
R4D "120k" RESC3216X65N -14.331,35.758 r0 top (schematic designator R4)
R5A "30k" RESC1608X55N -7.45,80.057 r0 top (schematic designator R5)
R5B "30k" RESC1608X55N -7.306,65.531 r0 top (schematic designator R5)
R5C "30k" RESC1608X55N -6.931,49.514 r0 top (schematic designator R5)
R5D "30k" RESC1608X55N -6.931,35.647 r0 top (schematic designator R5)
R6A "120k" RESC3216X65N -14.85,77.95 r0 top (schematic designator R6)
R6B "120k" RESC3216X65N -14.706,63.424 r0 top (schematic designator R6)
R6C "120k" RESC3216X65N -14.331,47.407 r0 top (schematic designator R6)
R6D "120k" RESC3216X65N -14.331,33.539 r0 top (schematic designator R6)
R7A "30k" RESC1608X55N -7.4,77.95 r0 top (schematic designator R7)
R7B "30k" RESC1608X55N -7.256,63.424 r0 top (schematic designator R7)
R7C "30k" RESC1608X55N -6.881,47.407 r0 top (schematic designator R7)
R7D "30k" RESC1608X55N -6.881,33.539 r0 top (schematic designator R7)
R8 "22k" RESC1005X40N 34.493,24.313 r270 top
R9 "22k" RESC1005X40N 35.905,23.718 r0 top
R10 "22k" RESC1005X40N 38.038,22.805 r0 top
R11 "22k" RESC1005X40N 36.606,20.891 r0 top
R12A "120k" RESC3216X65N -14.8,84.538 r0 top (schematic designator R12)
R12B "120k" RESC3216X65N -14.656,70.012 r0 top (schematic designator R12)
R12C "120k" RESC3216X65N -14.281,53.995 r0 top (schematic designator R12)
R12D "120k" RESC3216X65N -14.281,40.128 r0 top (schematic designator R12)
R13A "30k" RESC1608X55N -7.65,84.538 r0 top (schematic designator R13)
R13B "30k" RESC1608X55N -7.506,70.012 r0 top (schematic designator R13)
R13C "30k" RESC1608X55N -7.131,53.995 r0 top (schematic designator R13)
R13D "30k" RESC1608X55N -7.131,40.128 r0 top (schematic designator R13)
R14A "120k" RESC3216X65N -14.85,82.415 r0 top (schematic designator R14)
R14B "120k" RESC3216X65N -14.706,67.889 r0 top (schematic designator R14)
R14C "120k" RESC3216X65N -14.331,51.872 r0 top (schematic designator R14)
R14D "120k" RESC3216X65N -14.331,38.004 r0 top (schematic designator R14)
R15A "30k" RESC1608X55N -7.65,82.515 r0 top (schematic designator R15)
R15B "30k" RESC1608X55N -7.506,67.989 r0 top (schematic designator R15)
R15C "30k" RESC1608X55N -7.131,51.972 r0 top (schematic designator R15)
R15D "30k" RESC1608X55N -7.131,38.104 r0 top (schematic designator R15)
R16 "3k" RESC1608X55N 36.258,52.801 r90 top
R17 "3k" RESC1608X55N 33.538,52.801 r90 top
R18 "3k" RESC1608X55N 35.458,54.899 r180 top
R19 "3k" RESC1608X55N 34.958,52.801 r90 top
R20 "680" RESC1608X55N -7.06,6.872 r180 top
R21 "13k" RESC1005X40N -11.315,92.87 r270 top
R22 "3k3" RESC1005X40N 30.353,26.952 r90 top
R23 "4k7" RESC1608X55N 31.779,26.618 r270 top
R24 "4k7" RESC1608X55N -6.926,96.32 r180 top
R25 "13k" RESC1005X40N -17.254,12.471 r180 top
R26 "4k7" RESC1608X55N -16.58,10.461 r90 top
R27 "4k7" RESC1608X55N -23.3,19.519 r90 top
R28 "13k" RESC1005X40N -16.4,17.2 r180 top
R29 "4k7" RESC1608X55N -16.1,14.967 r90 top
R30 "4k7" RESC1608X55N -17.4,7.5 r0 top
R31 "4k7" RESC1608X55N -20.5,7.512 r0 top
R32 "4k7" RESC1608X55N -15.4,19.2 r270 top
R33 "4k7" RESC1608X55N -15.3,22.2 r270 top
R34 "3k3" RESC1005X40N 6.7,9.883 r0 top
R35 "4k7" RESC1608X55N -20.45,13.232 r180 top
R47 "3k3" RESC1005X40N 16.692,10.708 r180 top
R48 "3k3" RESC1005X40N 8.096,9.168 r270 top
R58 "47k" RESC1005X40N 39.774,9.588 r90 top
R59 "2k4" RESC1005X40N 38.798,9.602 r270 top
R60 "24k" RESC1005X40N 36.246,3.378 r90 top
R61 "2k4" RESC1005X40N 36.271,5.131 r90 top
R62 "13k" RESC1005X40N 34.963,4.571 r180 top
R63 "13k" RESC1005X40N 34.913,3.637 r180 top
R64 "13k" RESC1005X40N 34.894,2.847 r180 top
R76 "47k" RESC1005X40N 13.5,19.074 r0 top
R77 "Undefined" RESC1005X40N 12.822,29.481 r270 top
R78 "Undefined" RESC1005X40N 16.222,19.638 r0 top
R79 "Undefined" RESC1005X40N 10.467,22.26 r90 top
R80 "20k" RESC1005X40N 30.353,3.108 r270 top
SCREW1 "M2.5x4" BOSSARD_BN5687-3061587_v 265.636,132.286 r90 top
SCREW2 "M2.5x4" BOSSARD_BN5687-3061587_v 235.636,132.286 r90 top
SCREW3 "M2.5x4" BOSSARD_BN5687-3061587_v 265.636,152.286 r90 top
SCREW4 "M2.5x4" BOSSARD_BN5687-3061587_v 235.636,152.286 r90 top
SCREW5 "M2.5x4" BOSSARD_BN5687-3061587_v 265.636,172.286 r90 top
SCREW6 "M2.5x4" BOSSARD_BN5687-3061587_v 235.636,172.286 r90 top
T1 "BC857B" SOT95P230X110-3N -19,18.267 r0 top
T5 "BC857B" SOT95P230X110-3N -19.65,10.461 r0 top

## Footprints (in the part's own frame and the unit in brackets; to place one, negate y for a bottom-side part, rotate by r counter-clockwise, add the part's x,y. Pads: shape width x height; smd on the part's side, far side on the other; paste and mask are expansions set on the pad)
691382010003 [mm] "Horizontal PCB Header, pitch 2.5mm, 03p"
  rrect50% 2x2 hole 1.4: 1(-2.5,3.95)
  round 2 hole 1.4: 2(0,3.95) 3(2.5,3.95)
  silkscreen extent -4.75,-5.05 4.75,5.05, body extent -4.75,-5.05 4.75,5.05, height 8.15
60611002111502 [mm] "MCX PCB THT Jack"
  round 1.8 hole 1.2: 1(0,0)
  oval 2.286x2.55 hole 1.7: 2(-2.54,2.54) 3(2.54,2.54) 4(2.54,-2.54) 5(-2.54,-2.54)
  silkscreen extent -3,-6.5 3,3, body extent -3,-6.5 3,3, height 6
AMPHENOL_MINI-COOL-56P [mm] "PCB Mini Cool Edge 0.60mm,Storage and Server connector ,Gen Z, 56 signal pins, SMT"
  rect 0.38x2.12 smd far side: A1(-8.015,0.44) A4(-6.215,0.44) A7(-4.415,0.44) A10(-2.615,0.44) A13(-0.815,0.44) A16(0.985,0.44) A23(5.185,0.44) A24(5.785,0.44) A25(6.385,0.44) A26(6.985,0.44) A27(7.585,0.44) A28(8.185,0.44)
  rect 0.38x1.72 smd far side: A2(-7.415,0.64) A3(-6.815,0.64) A5(-5.615,0.64) A6(-5.015,0.64) A8(-3.815,0.64) A9(-3.215,0.64) A11(-2.015,0.64) A12(-1.415,0.64) A14(-0.215,0.64) A15(0.385,0.64) A17(1.585,0.64) A18(2.185,0.64) A19(2.785,0.64) A20(3.385,0.64) A21(3.985,0.64) A22(4.585,0.64)
  rect 0.38x1.72 smd: B1(-8.015,0.64) B2(-7.415,0.64) B3(-6.815,0.64) B4(-6.215,0.64) B5(-5.615,0.64) B6(-5.015,0.64) B7(-4.415,0.64) B8(-3.815,0.64) B9(-3.215,0.64) B10(-2.615,0.64) B11(-2.015,0.64) B12(-1.415,0.64) B14(-0.215,0.64) B15(0.385,0.64) B17(1.585,0.64) B18(2.185,0.64) B20(3.385,0.64) B21(3.985,0.64) B23(5.185,0.64) B24(5.785,0.64) B26(6.985,0.64) B27(7.585,0.64)
  rect 0.38x2.12 smd: B13(-0.815,0.44) B16(0.985,0.44) B19(2.785,0.44) B22(4.585,0.44) B25(6.385,0.44) B28(8.185,0.44)
  KeepOutLayer lines w0.2: 11.14,4.5 10.24,4.5 ccw(c10.24,3.5) 9.24,3.5 9.24,-0.75 8.49,-1.5 -8.49,-1.5 -9.24,-0.75 -9.24,3.5 ccw(c-10.24,3.5) -10.24,4.5 -11.14,4.5
BOSSARD_BN5687-3061587_v [mm] "M2.5 L=4mm Hexalobular Socket Pan Head Screw, Fully Threaded - Stainless Steel A2"
  body extent -2.5,-2.5 2.5,2.5, height 2.1
CAPC1005X55N [mm] "Capacitor, Non-Polarized, Chip; 1.00mm L X 0.50mm W X 0.70mm H, IPC Medium Density"
  rect 0.62x0.62 smd: 1(-0.45,0) 2(0.45,0)
  body extent -0.52,-0.27 0.53,0.28, height 0.55
CAPC1608X80N [mm] "Chip Capacitor, Body 1.6x0.8mm IPC Medium Density"
  rect 1x1 smd: 1(-0.75,0) 2(0.75,0)
  body extent -0.87,-0.47 0.88,0.48, height 0.8
CAPC1608X90N [mm] "Chip Capacitor, Body 1.6x0.8mm IPC Medium Density"
  rect 0.95x0.95 smd: 1(-0.75,0) 2(0.75,0)
  body extent -0.85,-0.45 0.85,0.45, height 0.9
CAPMP3528X210N [mm] "Capacitor, Polarized, Molded  Body 3.5x2.8mm, IPC Medium Density"
  rect 1.8x2.25 smd: 1(-1.45,0) 2(1.45,0)
  silkscreen extent -2.52,-1.5 1.85,1.72, body extent -1.85,-1.5 1.85,1.5, height 2.1
FUSRC3216X100N [mm] "Chip Resettable Fuse, 2-Leads, Body 3.2mmx1.6mm, IPC Medium Density"
  rect 1.15x1.8 smd: 1(-1.5,0) 2(1.5,0)
  silkscreen extent -0.5,-0.9 0.5,0.9, body extent -1.7,-0.9 1.7,0.9, height 1
HVQFN20_SOT662-1_5X5_NXP [mil]
  rect 42x13 smd paste+0 mask+0: 1(-91.5,51.18) 2(-91.5,25.59) 3(-91.5,0) 4(-91.5,-25.59) 5(-91.5,-51.18) 11(91.5,-51.18) 12(91.5,-25.59) 13(91.5,0) 14(91.5,25.59) 15(91.5,51.18)
  rect 13x42 smd paste+0 mask+0: 6(-51.18,-91.5) 7(-25.59,-91.5) 8(0,-91.5) 9(25.59,-91.5) 10(51.18,-91.5) 16(51.18,91.5) 17(25.59,91.5) 18(0,91.5) 19(-25.59,91.5) 20(-51.18,91.5)
  rect 122x122 smd paste-61 mask+0: 21(0,0)
  silkscreen extent -130,-132 104,132, body extent -101,-101 101,101, height 39
IND_WURTH_WE-TPC_4828 [mm] "Shielded Tiny Power Inductor, Body 4.8x4.8mm"
  rect 0.95x5.3 smd: 1(-2.275,0) 2(2.275,0)
  rect 1.05x1.014 smd: 1(-1.275,2.143) 1(-1.275,-2.143) 2(1.275,2.143) 2(1.275,-2.143)
  L1 region: 0.75,-2.65 2.75,-2.65 2.75,2.65 0.75,2.65 0.75,1.636 1.394,1.138 1.753,0.407 1.753,-0.407 1.394,-1.138 0.75,-1.636 0.75,-1.636
  L1 region: -2.75,-2.65 -0.75,-2.65 -0.75,-1.636 -1.394,-1.138 -1.753,-0.407 -1.753,0.407 -1.394,1.138 -0.75,1.636 -0.75,1.636 -0.75,2.65 -2.75,2.65
  L1 region: 2.75,-2.65 0.75,-2.65 0.75,-1.636 1.394,-1.138 1.753,-0.407 1.753,0.407 1.394,1.138 0.75,1.636 0.75,1.636 0.75,2.65 2.75,2.65
  silkscreen extent -0.35,-2.4 0.35,2.4, body extent -2.4,-2.4 2.4,2.4, height 2.8
INDM3225X240N [mm] "Inductor, Molded Body; 3.20mm L X 2.50mm W, IPC Medium Density"
  rect 1.55x1.95 smd: 1(-1.45,0) 2(1.45,0)
  silkscreen extent -0.3,-1.25 0.3,1.25, body extent -1.7,-1.35 1.7,1.35, height 2.4
LED_AVAGO_HSMC-C120 [mm] "Red Chip LED, 2-Leads, Body 1.7x1.1mm, Side Emitting Package"
  rect 0.8x0.7 smd: 1(-1,0) 2(1,0)
  rect 0.4x0.4 smd: 3(0,-0.35)
  silkscreen extent -1.12,-0.92 0.42,0.8, body extent -0.85,-0.3 0.85,0.8, height 0.7
LED_AVAGO_HSME-C120 [mm] "Green Chip LED, 2-Leads, Body 1.7x1.1mm, Side Emitting Package"
  rect 0.8x0.7 smd: 1(-1,0) 2(1,0)
  rect 0.4x0.4 smd: 3(0,-0.35)
  silkscreen extent -1.12,-0.92 0.42,0.8, body extent -0.85,-0.3 0.85,0.8, height 0.7
MTG270_500#1 [mm] "Plated Through Hole: Hole Dia.=2.7mm Pad Dia.=5.0mm"
  round 5 / inner round 4 / far side round 5 hole 2.7: 1(0,0)
MTG270_500#2 [mm] "Plated Through Hole: Hole Dia.=2.7mm Pad Dia.=5.0mm"
  round 5 hole 2.7: 1(0,0)
"Net Tie 3" [mm] "SMD Net Tie"
  rect 0.3x0.3 smd paste-2539.97 mask-0.064: 1(0,0) 2(0.6,0)
  L1 lines w0.3: 0.6,0 0,0
QFP50P1600X1600X160-100N [mm] "QFP, 0.50mm Pitch, Square; 100 Pin,14.00mm L X 14.00mm W X 1.60mm H Body, IPC Medium Density"
  rect 1.5x0.3 smd: 1(-7.7,6) 2(-7.7,5.5) 3(-7.7,5) 4(-7.7,4.5) 5(-7.7,4) 6(-7.7,3.5) 7(-7.7,3) 8(-7.7,2.5) 9(-7.7,2) 10(-7.7,1.5) 11(-7.7,1) 12(-7.7,0.5) 13(-7.7,0) 14(-7.7,-0.5) 15(-7.7,-1) 16(-7.7,-1.5) 17(-7.7,-2) 18(-7.7,-2.5) 19(-7.7,-3) 20(-7.7,-3.5) 21(-7.7,-4) 22(-7.7,-4.5) 23(-7.7,-5) 24(-7.7,-5.5) 25(-7.7,-6) 51(7.7,-6) 52(7.7,-5.5) 53(7.7,-5) 54(7.7,-4.5) 55(7.7,-4) 56(7.7,-3.5) 57(7.7,-3) 58(7.7,-2.5) 59(7.7,-2) 60(7.7,-1.5) 61(7.7,-1) 62(7.7,-0.5) 63(7.7,0) 64(7.7,0.5) 65(7.7,1) 66(7.7,1.5) 67(7.7,2) 68(7.7,2.5) 69(7.7,3) 70(7.7,3.5) 71(7.7,4) 72(7.7,4.5) 73(7.7,5) 74(7.7,5.5) 75(7.7,6)
  rect 0.3x1.5 smd: 26(-6,-7.7) 27(-5.5,-7.7) 28(-5,-7.7) 29(-4.5,-7.7) 30(-4,-7.7) 31(-3.5,-7.7) 32(-3,-7.7) 33(-2.5,-7.7) 34(-2,-7.7) 35(-1.5,-7.7) 36(-1,-7.7) 37(-0.5,-7.7) 38(0,-7.7) 39(0.5,-7.7) 40(1,-7.7) 41(1.5,-7.7) 42(2,-7.7) 43(2.5,-7.7) 44(3,-7.7) 45(3.5,-7.7) 46(4,-7.7) 47(4.5,-7.7) 48(5,-7.7) 49(5.5,-7.7) 50(6,-7.7) 76(6,7.7) 77(5.5,7.7) 78(5,7.7) 79(4.5,7.7) 80(4,7.7) 81(3.5,7.7) 82(3,7.7) 83(2.5,7.7) 84(2,7.7) 85(1.5,7.7) 86(1,7.7) 87(0.5,7.7) 88(0,7.7) 89(-0.5,7.7) 90(-1,7.7) 91(-1.5,7.7) 92(-2,7.7) 93(-2.5,7.7) 94(-3,7.7) 95(-3.5,7.7) 96(-4,7.7) 97(-4.5,7.7) 98(-5,7.7) 99(-5.5,7.7) 100(-6,7.7)
  silkscreen extent -8.32,-6.6 6.6,6.77, body extent -8.02,-8.02 8.02,8.02, height 1.6
RESC1005X40N [mm] "Chip Resistor, EIA 0402, Metric 1005, Body 1.0x0.5mm, IPC Medium Density"
  rect 0.58x0.62 smd: 1(-0.47,0) 2(0.47,0)
  body extent -0.52,-0.27 0.53,0.28, height 0.4
RESC1608X55N [mm] "Chip Resistor, EIA 0603, Metric 1608, Body 1.6x0.8mm, IPC Medium Density"
  rect 0.9x1 smd: 1(-0.8,0) 2(0.8,0)
  body extent -0.87,-0.47 0.88,0.48, height 0.55
RESC3216X65N [mm] "Chip Resistor, EIA 1206, Metric 3216, Body 3.2x1.6mm, IPC Medium Density"
  rect 1.15x1.8 smd: 1(-1.45,0) 2(1.45,0)
  silkscreen extent -0.5,-0.8 0.5,0.8, body extent -1.67,-0.87 1.68,0.88, height 0.65
SOIC127P600X175-8N [mm] "SOIC 8, Pitch 1.27mm - Body 4x5mm, IPC Medium Density"
  rect 1.55x0.6 smd: 1(-2.7,1.905) 2(-2.7,0.635) 3(-2.7,-0.635) 4(-2.7,-1.905) 5(2.7,-1.905) 6(2.7,-0.635) 7(2.7,0.635) 8(2.7,1.905)
  silkscreen extent -2.53,-2.5 1.55,2.88, body extent -3.1,-2.5 3.1,2.5, height 1.75
SOP50P490X110-10N [mm] "MSOP, 10-Leads, Body 3.1x3.1mm (max), Pitch 0.50mm, IPC Medium Density"
  rect 1.5x0.3 smd: 1(-2.2,1) 2(-2.2,0.5) 3(-2.2,0) 4(-2.2,-0.5) 5(-2.2,-1) 6(2.2,-1) 7(2.2,-0.5) 8(2.2,0) 9(2.2,0.5) 10(2.2,1)
  silkscreen extent -2.82,-1.5 1.12,1.77, body extent -2.45,-1.55 2.45,1.55, height 1.1
SOP65P490X110-8N [mm] "SOP, 0.65mm pitch; 8 pin, 3.00mm W X 3.00mm L X 1.10mm H body, IPC Medium Density"
  rect 1.5x0.45 smd: 1(-2.2,0.975) 2(-2.2,0.325) 3(-2.2,-0.325) 4(-2.2,-0.975) 5(2.2,-0.975) 6(2.2,-0.325) 7(2.2,0.325) 8(2.2,0.975)
  silkscreen extent -2.82,-1.5 1.12,1.83, body extent -2.45,-1.55 2.45,1.55, height 1.1
SOT95P230X110-3N [mm] "SOT23, 3 pin, Pitch 0.95mm - 1.3mm W X 2.9mm L X 1.1mm H, IPC Medium Density"
  rect 1x0.6 smd: 1(-1.15,0.95) 2(-1.15,-0.95) 3(1.15,0)
  silkscreen extent -1.52,-1.45 0.33,1.87, body extent -1.08,-1.5 1.25,1.5, height 1.1
SOT230P700X180-4N [mm] "SOT223, 2.30mm pitch; 3 pin, 3.70mm W X 6.70mm L, IPC Medium Density"
  rect 2.15x0.95 smd: 1(-2.9,2.3) 2(-2.9,0) 3(-2.9,-2.3)
  rect 2.15x3.25 smd: 4(2.9,0)
  silkscreen extent -3.87,-3.35 1.45,3.47, body extent -3.65,-3.35 3.65,3.35, height 1.81
TC2030-MCP [mm] "TAG-CONNECT IN-CIRCUIT Cable Legged"
  round 0.8 smd paste-0.4: 1(-1.27,-0.635) 2(-1.27,0.635) 3(0,-0.635) 4(0,0.635) 5(1.27,-0.635) 6(1.27,0.635)
  round 0.5 hole 2.4 unplated mask+0.95: Mech(-2.54,-2.54) Mech(-2.54,2.54) Mech(0.635,-2.54) Mech(0.635,2.54)
  round 0.5 hole 1 unplated mask+0.25: Mech(-2.54,0) Mech(2.54,-1.016) Mech(2.54,1.016)
  L1 keep-out region: -1.27,0.085 -0.995,0.159 -0.794,0.36 -0.72,0.635 -0.72,0.635 -0.55,0.635 -0.508,0.425 -0.389,0.246 -0.21,0.127 0,0.085 0,0.085 0.21,0.127 0.389,0.246 0.508,0.425 0.55,0.635 0.55,0.635 0.72,0.635 0.762,0.425 0.881,0.247 1.059,0.128 1.269,0.086 1.269,0.086 1.3,0.086 1.3,-0.086 1.269,-0.086 1.059,-0.128 0.881,-0.247 0.762,-0.425 0.72,-0.635 0.72,-0.635 0.55,-0.635 0.508,-0.425 0.389,-0.246 0.21,-0.127 0,-0.085 0,-0.085 -0.21,-0.127 -0.389,-0.246 -0.508,-0.425 -0.55,-0.635 -0.55,-0.635 -0.72,-0.635 -0.762,-0.425 -0.881,-0.246 -1.06,-0.127 -1.27,-0.085 -1.27,-0.085
"TEXAS_RHL (S-PVQFN-N24)" [mm] "TEXAS Case Style RHL (S-PVQFN-N24), QFN, 0.50mm Pitch, Rectangular; 24 Pin, 5.50mm L X 3.50mm W X 1mm H body (w/thermal tab 4.05 X 2.05mm)"
  oval 0.28x0.85 smd: 1(-0.75,2.725) 12(-0.75,-2.725) 13(0.75,-2.725) 24(0.75,2.725)
  oval 0.85x0.28 smd: 2(-1.725,2.25) 3(-1.725,1.75) 4(-1.725,1.25) 5(-1.725,0.75) 6(-1.725,0.25) 7(-1.725,-0.25) 8(-1.725,-0.75) 9(-1.725,-1.25) 10(-1.725,-1.75) 11(-1.725,-2.25) 14(1.725,-2.25) 15(1.725,-1.75) 16(1.725,-1.25) 17(1.725,-0.75) 18(1.725,-0.25) 19(1.725,0.25) 20(1.725,0.75) 21(1.725,1.25) 22(1.725,1.75) 23(1.725,2.25)
  rect 0.23x0.825 smd: 25(-0.275,-2.738) 25(-0.275,2.738) 25(0.275,-2.738) 25(0.275,2.738)
  rect 2.05x4.05 smd: 25(0,0)
  rect 0.78x0.5 smd: 25(0,2.175) 25(0,-2.175)
  silkscreen extent -1.75,-2.75 1.75,3.9, body extent -1.75,-2.75 1.75,2.75, height 1